# Altium PCB PCB1.PcbDoc
Units mm, origin at the board's own origin, x right, y up, seen from the top; angles counter-clockwise.
Board outline 90.68 x 56.01 mm, 2 copper layers (Top Layer, Bottom Layer); 22 components, 17 nets, 92 pads, 0 vias.
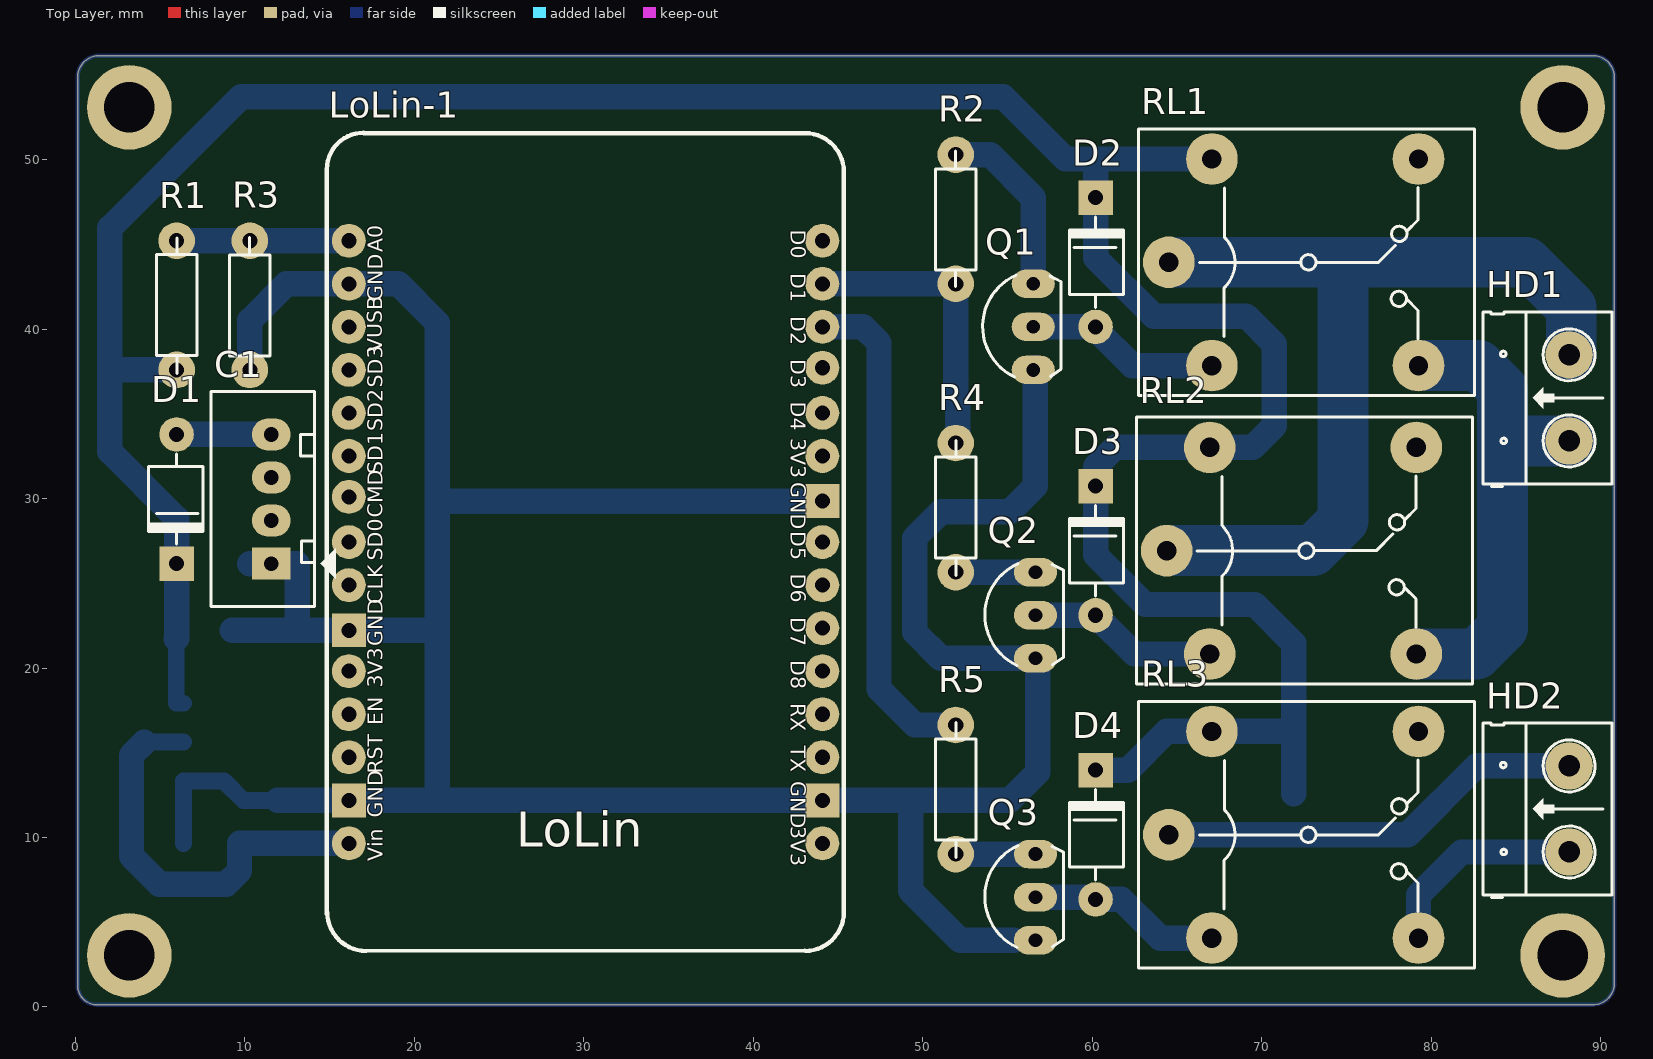
[diagram p0: Top Layer view]
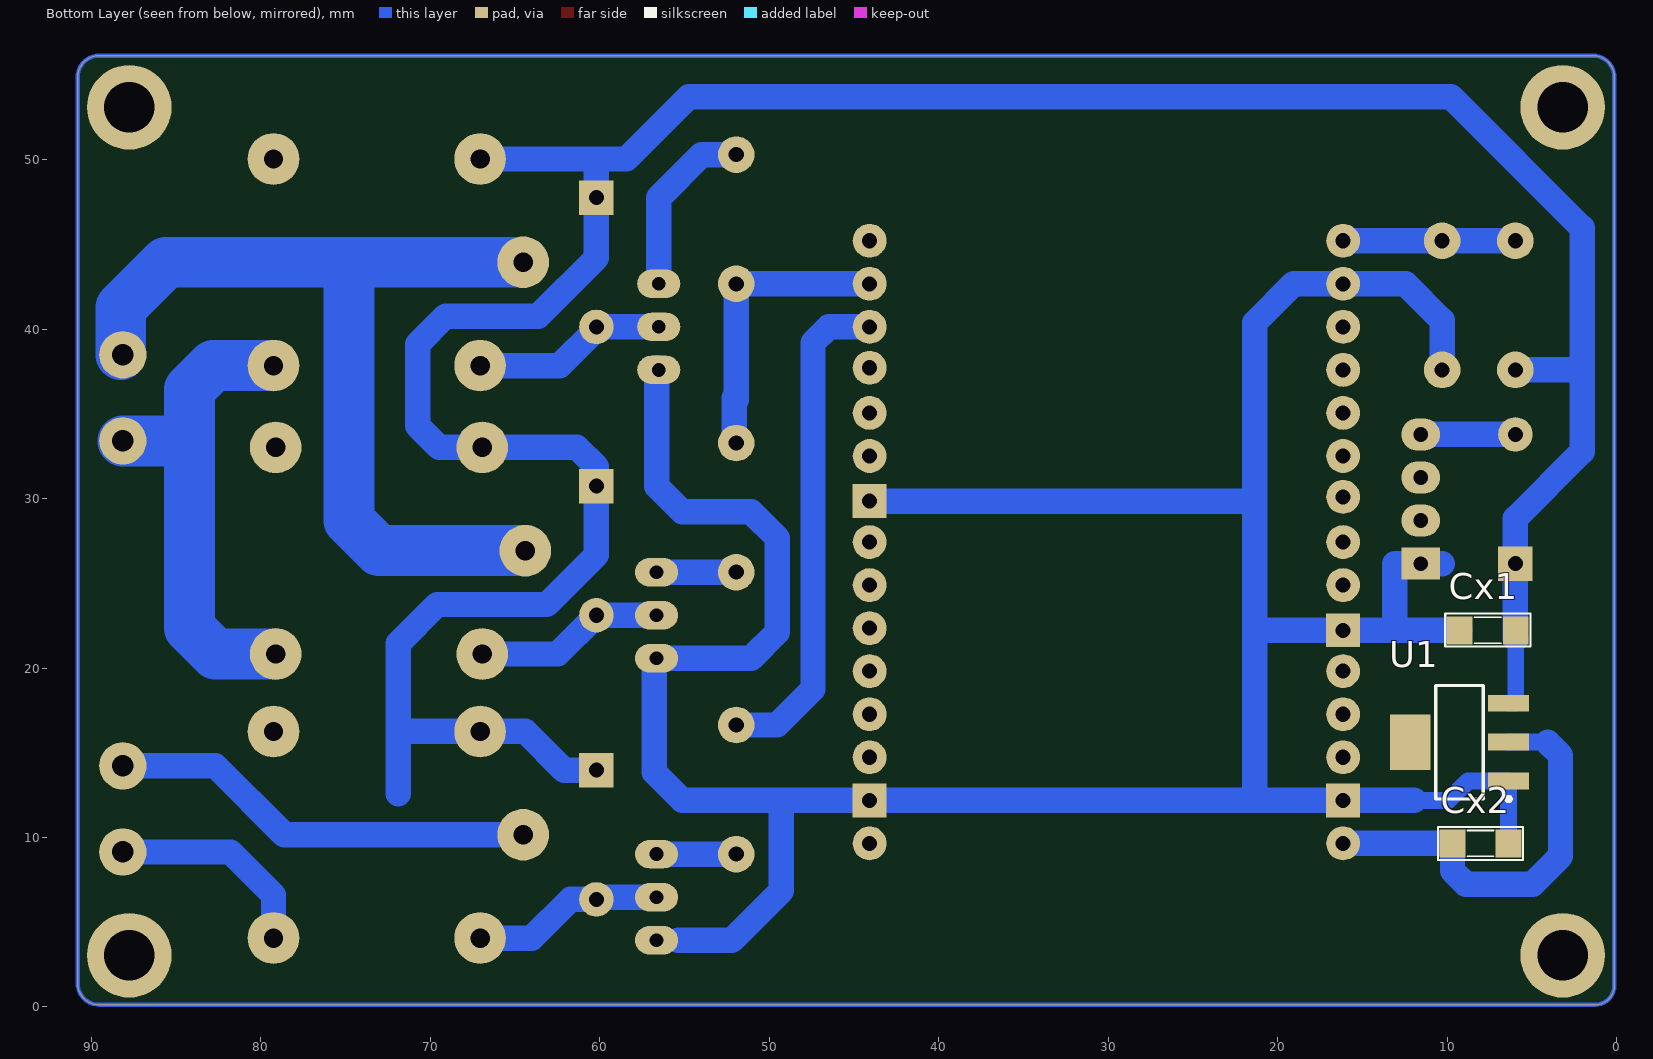
[diagram p1: Bottom Layer view, seen from below]
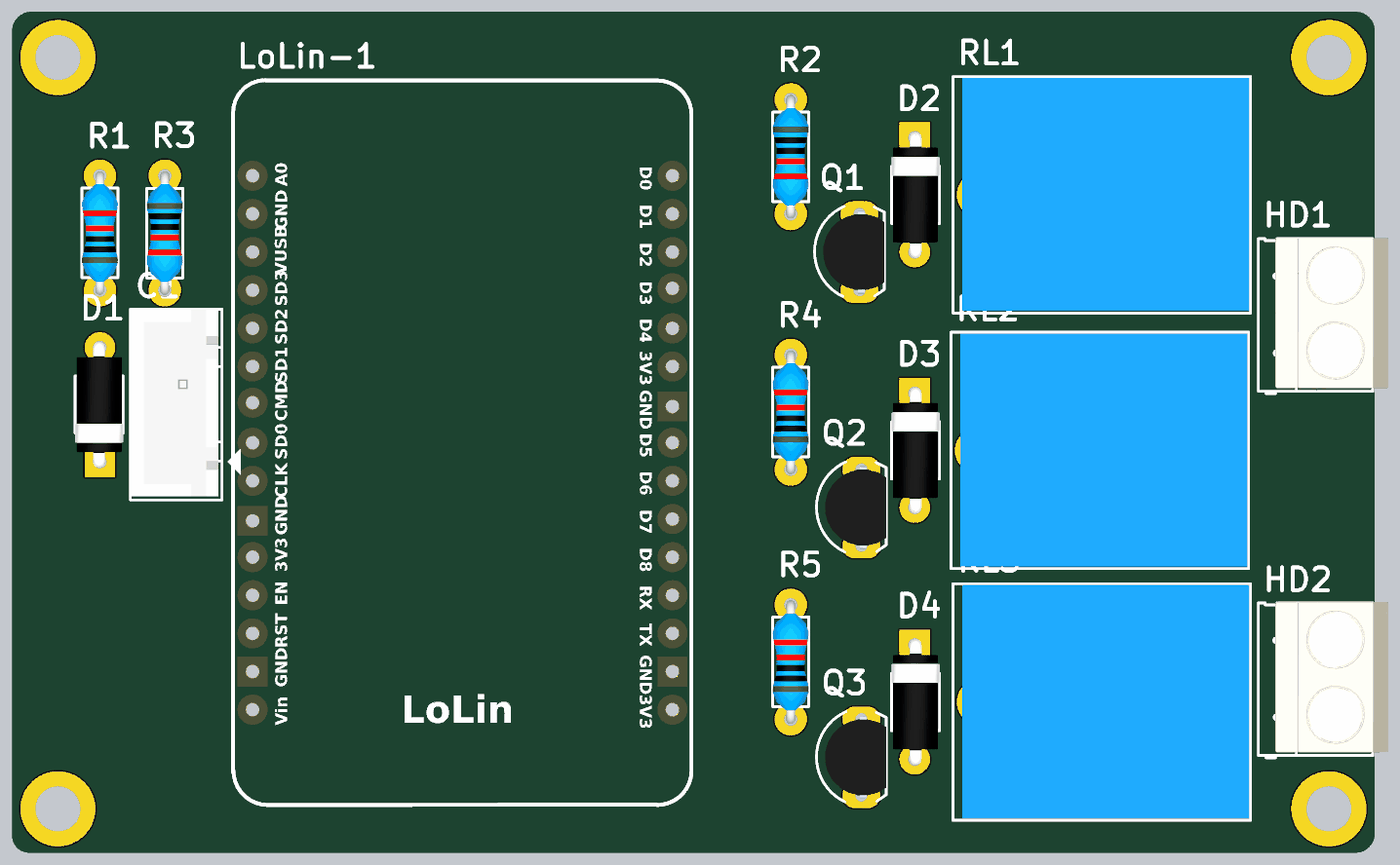
[diagram p2: 3D render of the assembled board from above, using the file's embedded part models]
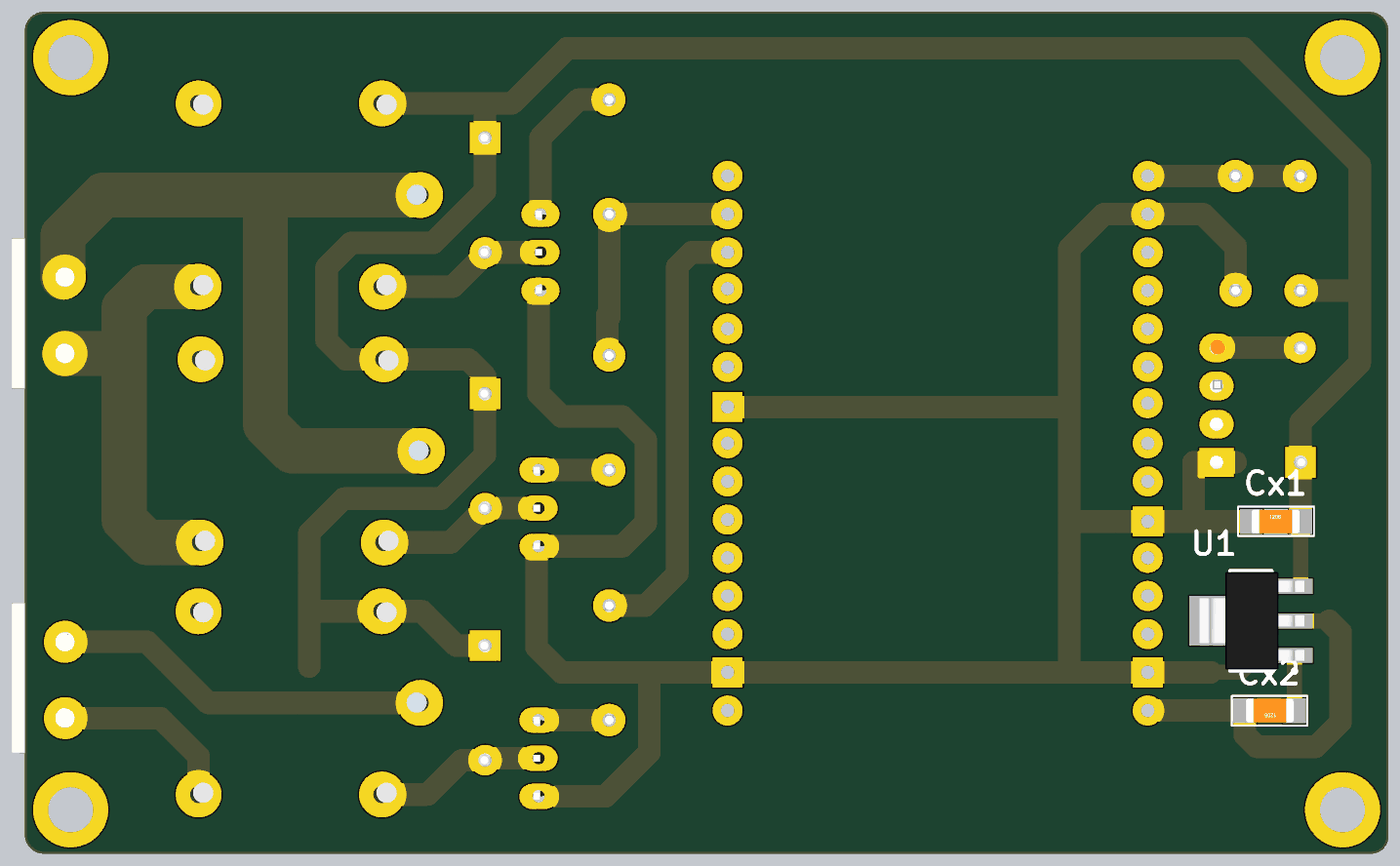
[diagram p3: 3D render of the assembled board from below, using the file's embedded part models]

## Layer stack, top to bottom
Top Solder: solder mask 0.0102, Solder Resist, Dk 3.5
Top Layer: signal copper 0.0356
Dielectric 1: dielectric 0.32, FR-4, Dk 4.8
Bottom Layer: signal copper 0.0356
Bottom Solder: solder mask 0.0102, Solder Resist, Dk 3.5

## Board outline
1.27,0.127 cw(c1.27,1.27) 0.127,1.27 0.127,54.864 cw(c1.397,54.864) 1.397,56.134 89.535,56.134 cw(c89.535,54.864) 90.805,54.864 90.805,1.397 cw(c89.535,1.397) 89.535,0.127

## Design rules (kind name [scope] priority, off if disabled: settings)
Clearance [All] p1: gap=0.6 ignorepadtopadclearanceinfootprint=TRUE
PolygonConnect [All] p1: connectstyle=Relief reliefconductorwidth=0.254 reliefentries=4 polygonreliefangle="90 Angle" airgapwidth=0.254
RoomDefinition schematic [InComponentClass('schematic')] p1: confinementstyle=ConfineIn formatcopy=TRUE lockcomponents=FALSE outline -27.94,-70.866 22.86,-70.866 22.86,-45.466 -27.94,-45.466
RoutingVias [All] p1: holewidth=0.711 width=1.27 viastyle="Through Hole" minholewidth=0.711 minwidth=1.27 maxholewidth=0.711 maxwidth=1.27
SolderMaskExpansion [All] p1: expansion=0.102
Width [All] p1: maxlimit=3 minlimit=1 preferedwidth=1.5
30 further rules are at their usual default settings.

## Components (designator, comment, footprint, x,y, rotation, side; value= is the part's Value field where it differs from the comment)
C1 "Header4" Header4 11.557,26.162 r90 top
Cx1 "XXpF" CN-SMD-1206 7.62,22.225 r180 bottom value=33pF
Cx2 "XXpF" CN-SMD-1206 8.001,9.652 r0 bottom value=33pF
D1 "Diode" DIO-1A-SMALL 5.969,35.052 r90 top value=1N5007
D2 "Diode" DIO-1A-SMALL 60.198,38.862 r270 top value=1N5007
D3 "Diode" DIO-1A-SMALL 60.198,21.844 r270 top value=1N5007
D4 "Diode" DIO-1A-SMALL 60.198,5.08 r270 top value=1N5007
HD1 "Header 2" HED2 88.138,33.401 r90 top
HD2 "Header 2" HED2 88.138,9.144 r90 top
LoLin-1 "NodeMCU V1.0 ESP-12E_1" "LoLin NodeMcu V3" 17.374,51.46 r0 top
Q1 "2SC1815" TO92-123 56.515,40.132 r90 top value=C1815
Q2 "2SC1815" TO92-123 56.642,23.114 r90 top value=C1815
Q3 "2SC1815" TO92-123 56.642,6.477 r90 top value=C1815
R1 "Res" RES-1/4W-SMALL 5.969,41.148 r90 top value=10k
R2 "Res" RES-1/4W-SMALL 51.943,46.736 r270 top value=4.7k
R3 "Res" RES-1/4W-SMALL 10.287,41.656 r270 top value=4.7k
R4 "Res" RES-1/4W-SMALL 51.943,29.21 r90 top value=4.7k
R5 "Res" RES-1/4W-SMALL 51.943,12.573 r90 top value=4.7k
RL1 "Relay 10A/12V" "RELAY 5" 72.771,43.942 r0 top value="Relay SPDT, 10A, 12V"
RL2 "Relay 10A/12V" "RELAY 5" 72.644,26.924 r0 top value="Relay SPDT, 10A, 12V"
RL3 "Relay 10A/12V" "RELAY 5" 72.771,10.16 r0 top value="Relay SPDT, 10A, 12V"
U1 "LM1117-3.3V" SOT223 9.271,15.621 r90 bottom

## Footprints (in the part's own frame and the unit in brackets; to place one, negate y for a bottom-side part, rotate by r counter-clockwise, add the part's x,y. Pads: shape width x height; smd on the part's side, far side on the other; paste and mask are expansions set on the pad)
CN-SMD-1206 [mil]
  rect 60x65 smd: 1(-64,0) 2(66,0)
  silkscreen extent -98,-38 100,39, body extent -63,-31 63,31, height 40
DIO-1A-SMALL [mil] "Diode 1A, W 100mil, L 350mil"
  round 80 hole 35: 1(-50,0)
  rect 80x80 hole 35: 2(-350,0)
  silkscreen extent -305,-61 -95,65, body extent -366,-61 -34,65, height 122
Header4 [mil] "CON4"
  rect 75x90 hole 34: 1(0,0)
  oval 75x90 hole 34: 2(100,0) 3(200,0) 4(300,0)
  silkscreen extent -100,-150 400,140, body extent -90,-90 398,136, height 276
HED2 [mil] "Header 2, 2 pin, hight 300mil, Pin to Pin 200, Colour Green"
  round 110 hole 50: 1(0,0) 2(200,0)
  silkscreen extent -106,-100 300,200, body extent -92,-140 302,155, height 394
"LoLin NodeMcu V3" [mil]
  round 78.74 hole 35: 3V3(-49,-1246) 3V3(1051,-1646) 3V3(1051,-746) A0(-49,-246) CLK(-49,-1046) CMD(-49,-841) D0(1051,-246) D1(1051,-346) D2(1051,-446) D3(1051,-541) D4(1051,-646) D5(1051,-946) D6(1051,-1046) D7(1051,-1146) D8(1051,-1246) EN(-49,-1346) GND(-49,-346) RST(-49,-1446) RX(1051,-1346) SD0(-49,-946) SD1(-49,-746) SD2(-49,-646) SD3(-49,-546) TX(1051,-1446) VIN(-49,-1646) VUSB(-49,-446)
  rect 78.74x78.74 hole 35: GND(-49,-1546) GND(-49,-1151) GND(1051,-1546) GND(1051,-851)
  silkscreen extent -100,-1896 1101,5
"RELAY 5" [mil] "Reley DPDT, 8 pin, 1A, W400mil, L800mil,H 300mil"
  round 120 hole 45: 1(-325,0) 2(255,240) 3(255,-240) 4(-225,-240) 5(-225,240)
  silkscreen extent -395,-310 385,310, body extent -371,-304 381,306, height 602
RES-1/4W-SMALL [mil]
  round 85 hole 35: 1(-140,0) 2(160,0)
  silkscreen extent -148,-47 166,47, body extent -152,-47 172,47, height 97
SOT223 [mm]
  rect 1x2.4 smd: 1(-2.3,-2.9) 2(0,-2.9) 3(2.3,-2.9)
  rect 3.3x2.4 smd: 4(0,2.9)
  silkscreen extent -3.47,-3.02 3.35,1.4, body extent -3.25,-3.56 3.25,3.4, height 1.68
TO92-123 [mil] "TO-92"
  oval 66x100 hole 32: 1(-100,0) 2(0,0) 3(100,0)
  silkscreen extent -117,-65 120,118, body extent -109,-66 109,95, height 245

## Part data
C1: "Header IDC, 4 x 1 Pin Vertical 2.54mm Pitch (Non-Boxed, Male)", Manufacturer="Würth Elektronik eiSos GmbH", partNo=613002143121, ComponentLink1 Description=Manufacturer, ComponentLink1URL=http://www.we-online.com, ComponentLink2 Description=Datasheet, ComponentLink2URL=http://katalog.we-online.de/em/datasheet/6130xx143121.pdf, Created by="Karrer Zheng", Created Date="29 March 2013", NoPins=02
Cx1 Cx2: library part CN
D1 D2 D3 D4: "Default Diode", Code - JEDEC=DO-214-AB, Published=8-Jun-2000, Publisher="Altium Limited", Revision="July-2002: Re-released for DXP Platform."
HD1 HD2: library part Hed2, "Header 2 (Green)"
LoLin-1: "LoLin NodeMCU V3"
Q1 Q2 Q3: "NPN 600mW, ECB", =C2383
R1 R2 R3 R4 R5: Manufacturer="Generic Components", Class=Passive, Published=08/06/2000, Publisher="Altium Hobart Technology Centre", SubClass=R
RL1 RL2 RL3: library part "Relay 5", "Relay SPDT,10A - 12VDC 5 Pin", ="Relay SPDT, 10A, 24V"
U1: library part LM1117, "800mA Low-Dropout Linear Regulator", Creator="Nguyen Ba Bien", Website=http://group3i.net

## Free pads (board coordinates)
  round 5 hole 3: 2(87.757,53.086) 3(3.175,53.086) 4(3.175,3.048) 5(87.757,3.048)

## Nets (pads, with @x,y where several pads share a name; then routed paths per layer and width w, separated by ;. In a path a pad name is that pad's centre, name@x,y a point inside that pad or via, vN(x,y) a via of type N, cw(c..) or ccw(c..) an arc to the next point about the centre after c; other vN are vias at no path point)
+5: Cx2.2 LoLin-1.VIN U1.2 | length 24.8
  Bottom Layer w1: 4.064,15.621 U1.2
  Bottom Layer w1.5: 4.064,15.621 3.302,14.859 3.302,8.89 4.953,7.239 8.89,7.239 9.677,8.026 Cx2.2 LoLin-1.VIN
GND: C1.1 Cx1.1 Cx2.1 LoLin-1.GND Q1.1 Q2.1 Q3.1 R3.2 U1.1 | length 189
  Bottom Layer w1: Cx2.1 6.371,9.656 U1.1 8.777,13.321 9.906,12.192 11.938,12.192
  Bottom Layer w1.5: Cx1.1 13.081,22.225 ; 10.287,26.162 C1.1 13.081,26.162 13.081,22.225 ; R3.2 10.287,40.513 12.446,42.672 16.129,42.672 19.05,42.672 21.336,40.386 21.336,29.845 ; 11.938,12.192 16.129,12.192 21.336,12.192 ; LoLin-1.GND@44.069,29.845 21.336,29.845 ; Q3.1@55.372,3.937 52.197,3.937 49.276,6.858 49.276,12.192 ; Q1.1@56.642,37.719 56.642,30.734 55.118,29.21 51.054,29.21 49.514,27.67 49.514,22.114 51.054,20.574 Q2.1 56.769,20.574 56.769,13.843 55.118,12.192 49.276,12.192 ; 13.081,22.225 16.129,22.225 21.336,22.225 ; 21.336,12.192 21.336,22.225 ; 21.336,12.192 44.069,12.192 49.276,12.192 ; 21.336,22.225 21.336,29.845
NetC1_4: C1.4 D1.1 | length 5.6
  Bottom Layer w1.5: D1.1 C1.4
NetD2_1: D2.1 Q1.2 RL1.4 | length 11.6
  Bottom Layer w1.5: Q1.2 D2.1 60.198,40.005 62.357,37.846 RL1.4
NetD3_1: D3.1 Q2.2 RL2.4 | length 11.2
  Bottom Layer w1.5: Q2.2 D3.1 62.484,20.828 RL2.4
NetD4_1: D4.1 Q3.2 RL3.4 | length 11.4
  Bottom Layer w1.5: Q3.2 60.071,6.477 D4.1 61.722,6.35 64.008,4.064 RL3.4
NetHD1_1: HD1.1 RL1.3 RL2.3 | length 29.1
  Bottom Layer w3: RL2.3 82.677,20.828 84.201,22.352 84.201,36.449 82.804,37.846 RL1.3 ; 84.328,33.401 HD1.1
NetHD1_2: HD1.2 RL1.1 RL2.1 | length 54
  Bottom Layer w3: RL2.1 73.025,26.924 74.803,28.702 74.803,43.942 ; RL1.1 74.803,43.942 ; HD1.2@88.265,38.481 88.265,41.275 85.598,43.942 74.803,43.942
NetHD2_1: HD2.1 RL3.3 | length 12.5
  Bottom Layer w1.5: RL3.3 79.248,6.604 81.788,9.144 HD2.1
NetHD2_2: HD2.2 RL3.1 | length 25.3
  Bottom Layer w1.5: RL3.1 78.613,10.16 82.677,14.224 HD2.2
NetLoLin-1_A0: LoLin-1.A0 R1.2 R3.1 | length 10.2
  Bottom Layer w1.5: R1.2 R3.1 LoLin-1.A0
NetLoLin-1_D1: LoLin-1.D1 R2.2 R4.2 | length 17.6
  Bottom Layer w1.5: LoLin-1.D1 R2.2 51.943,35.814 52.07,35.941 R4.2@52.07,33.274
NetLoLin-1_D2: LoLin-1.D2 R5.2 | length 29.7
  Bottom Layer w1.5: LoLin-1.D2 46.482,40.132 47.414,39.2 47.414,18.753 49.53,16.637 R5.2 R5.2@52.07,16.637
NetQ1_3: Q1.3 R2.1 | length 10.7
  Bottom Layer w1.5: R2.1 53.975,50.292 56.515,47.752 Q1.3
NetQ2_3: Q2.3 R4.1 | length 4.7
  Bottom Layer w1.5: R4.1 Q2.3
NetQ3_3: Q3.3 R5.1 | length 4.6
  Bottom Layer w1.5: R5.1@52.07,9.017 Q3.3
VCC: Cx1.2 D1.2 D2.2 D3.2 D4.2 R1.1 RL1.5 RL2.5 RL3.5 U1.3 | length 179.2
  Bottom Layer w1: Cx1.2@5.944,21.717 5.944,17.921 U1.3
  Bottom Layer w1.5: Cx1.2@5.944,21.717 5.969,21.742 D1.2 5.969,28.829 2.032,32.766 2.032,37.592 ; R1.1 2.032,37.592 ; D4.2 62.103,13.97 64.389,16.256 RL3.5 71.882,16.256 ; RL1.5 60.198,50.038 ; 71.882,12.573 71.882,16.256 ; 2.032,37.592 2.032,45.974 9.779,53.721 54.737,53.721 58.42,50.038 60.198,50.038 ; 60.198,50.038 D2.2 60.198,44.196 63.627,40.767 69.088,40.767 70.739,39.116 70.739,34.29 69.469,33.02 RL2.5 61.341,33.02 60.198,31.877 D3.2 60.198,26.67 63.119,23.749 69.596,23.749 71.882,21.463 71.882,16.256
pads on no net: C1.2 C1.3 LoLin-1.3V3 LoLin-1.CLK LoLin-1.CMD LoLin-1.D0 LoLin-1.D3 LoLin-1.D4 LoLin-1.D5 LoLin-1.D6 LoLin-1.D7 LoLin-1.D8 LoLin-1.EN LoLin-1.RST LoLin-1.RX LoLin-1.SD0 LoLin-1.SD1 LoLin-1.SD2 LoLin-1.SD3 LoLin-1.TX LoLin-1.VUSB RL1.2 RL2.2 RL3.2 U1.4
copper on no net: | length 291.2
  Bottom Layer w0.254: 0.127,1.27 ccw(c1.27,1.27) 1.27,0.127 89.535,0.127 ccw(c89.535,1.397) 90.805,1.397 90.805,54.864 ccw(c89.535,54.864) 89.535,56.134 88.011,56.134 1.397,56.134 ccw(c1.397,54.864) 0.127,54.864 0.127,1.27

## Text inside footprints (layer, text, board x,y; h text height)
LoLin-1: Top Overlay "GND" at 18.415,21.285 h1.52 r90; Top Overlay "3V3" at 18.415,18.821 h1.52 r90; Top Overlay "EN" at 18.415,16.612 h1.52 r90; Top Overlay "RST" at 18.415,13.767 h1.52 r90; Top Overlay "GND" at 18.415,11.151 h1.52 r90; Top Overlay "Vin" at 18.415,8.611 h1.52 r90; Top Overlay "D7" at 41.91,22.981 h1.52 r270; Top Overlay "D8" at 41.91,20.444 h1.52 r270; Top Overlay "RX" at 41.91,17.931 h1.52 r270; Top Overlay "TX" at 41.91,15.418 h1.52 r270; Top Overlay "GND" at 41.91,13.304 h1.52 r270; Top Overlay "3V3" at 41.91,10.668 h1.52 r270; Top Overlay "D6" at 41.91,25.549 h1.52 r270; Top Overlay "CMD" at 18.415,28.876 h1.52 r90; Top Overlay "D0" at 41.91,45.872 h1.52 r270; Top Overlay "D1" at 41.91,43.298 h1.52 r270; Top Overlay "D2" at 41.91,40.752 h1.52 r270; Top Overlay "D3" at 41.91,38.212 h1.52 r270; Top Overlay "D4" at 41.91,35.712 h1.52 r270; Top Overlay "3V3" at 41.91,33.553 h1.52 r270; Top Overlay "GND" at 41.91,30.963 h1.52 r270; Top Overlay "D5" at 41.91,28.067 h1.52 r270; Top Overlay "A0" at 18.415,44.526 h1.52 r90; Top Overlay "GND" at 18.415,41.631 h1.52 r90; Top Overlay "VUSB" at 18.39,38.633 h1.52 r90; Top Overlay "SD3" at 18.415,36.529 h1.52 r90; Top Overlay "SD2" at 18.415,33.978 h1.52 r90; Top Overlay "SD1" at 18.415,31.427 h1.52 r90; Top Overlay "SD0" at 18.415,26.325 h1.52 r90; Top Overlay "CLK" at 18.415,23.774 h1.52 r90; Top Overlay "LoLin" at 26.01,8.788 h3.56